# Altium PCB SL.PcbDoc (part 1 of 2)
Units mm, origin at the board's own origin, x right, y up, seen from the top; angles counter-clockwise.
Board outline 70 x 42.24 mm, 2 copper layers (Top Layer, Bottom Layer); 144 components, 106 nets, 459 pads, 155 vias.
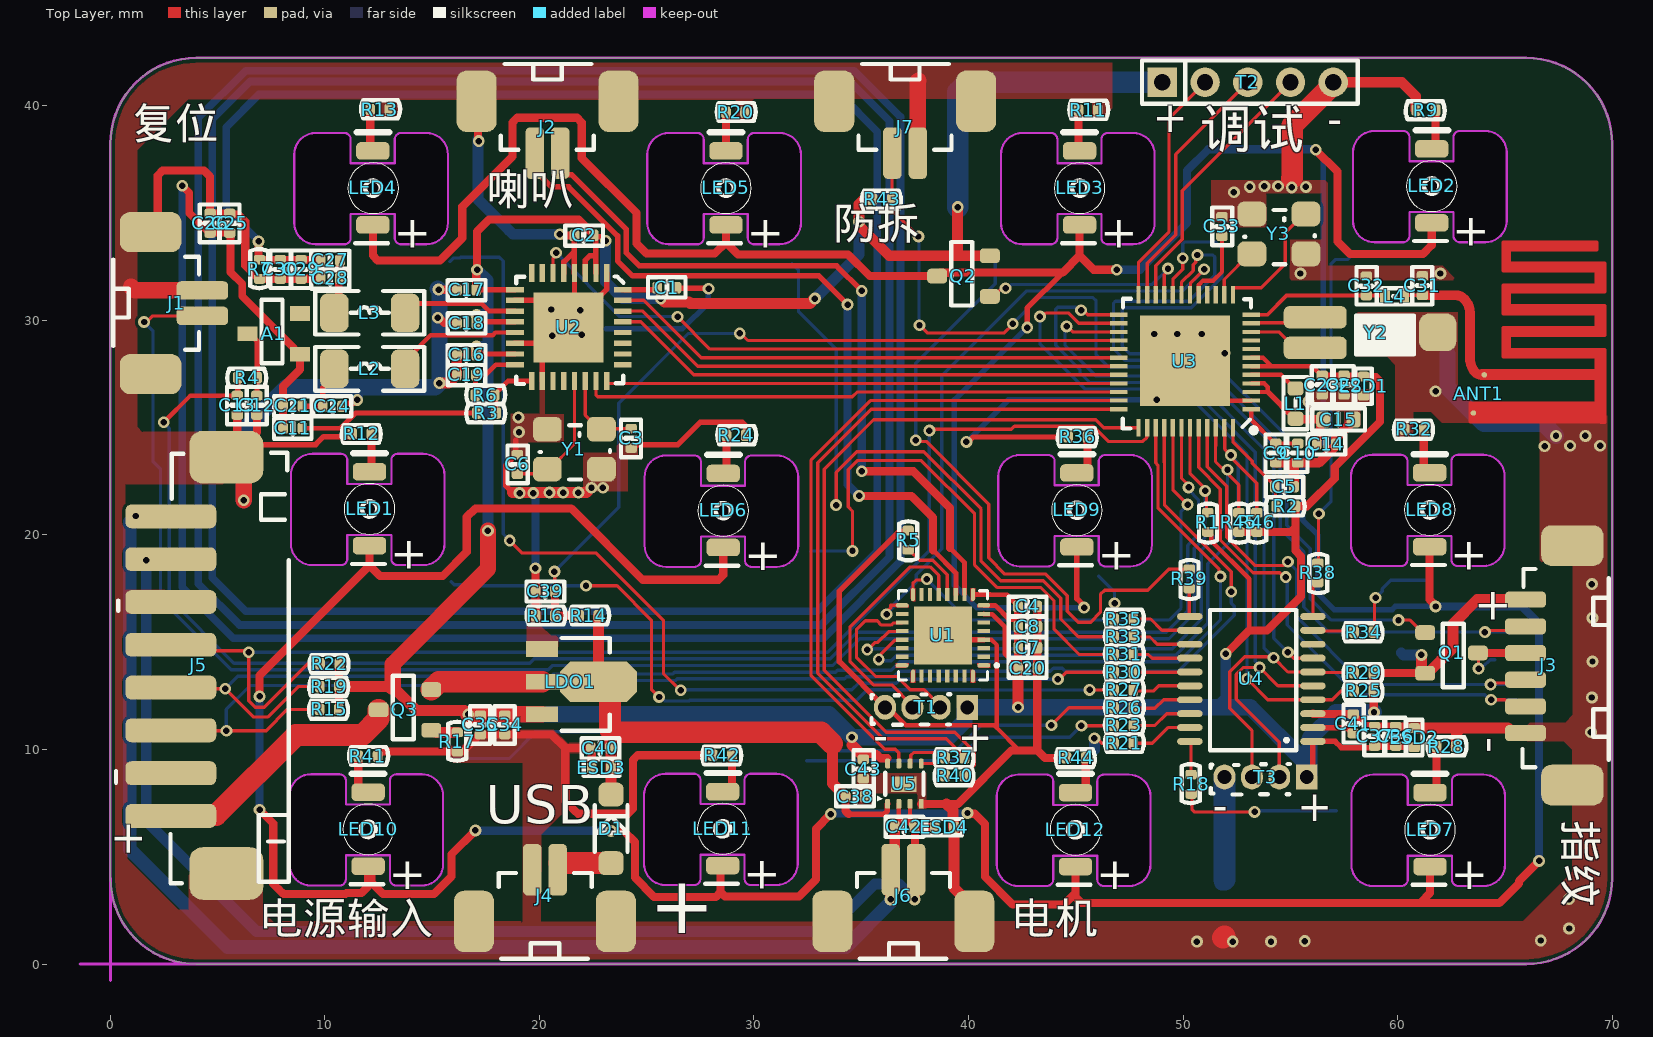
[diagram p0: Top Layer view]
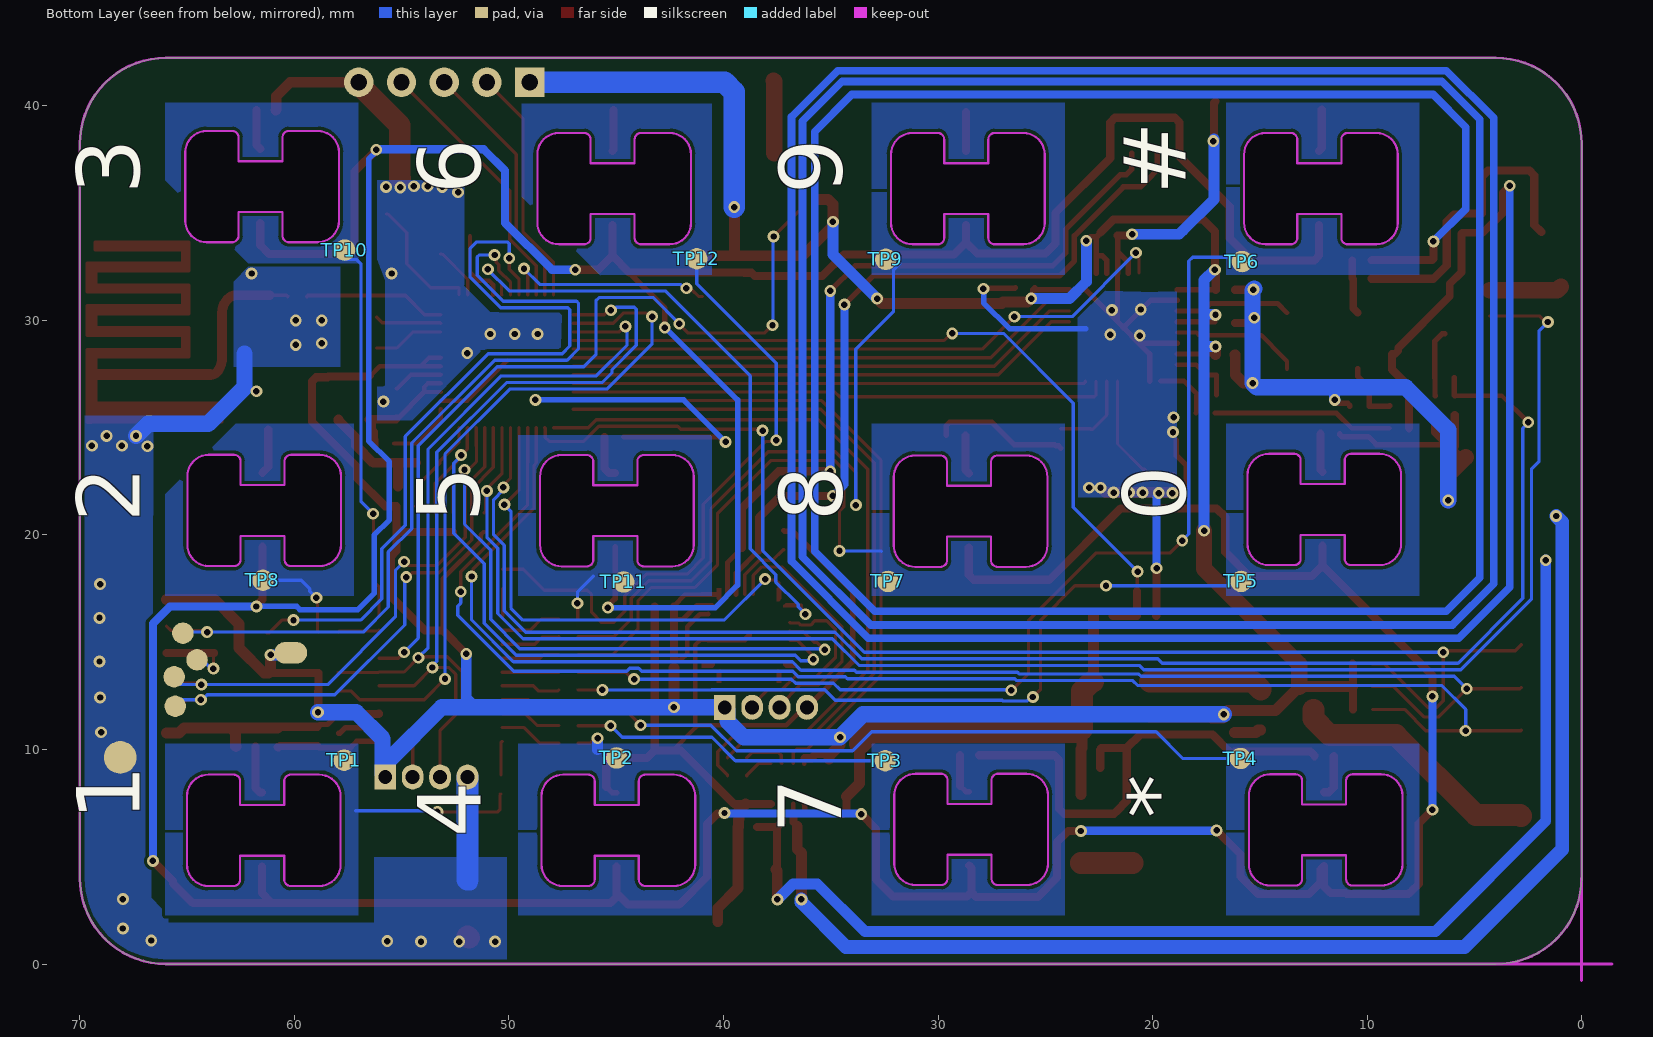
[diagram p1: Bottom Layer view, seen from below]

## Layer stack, top to bottom
Top Solder: solder mask 0.0102, Solder Resist, Dk 3.5
Top Layer: signal copper 0.0356
Dielectric 1: dielectric 0.32, FR-4, Dk 4.8
Bottom Layer: signal copper 0.0356
Bottom Solder: solder mask 0.0102, Solder Resist, Dk 3.5

## Board outline
0,4 0,38.237 cw(c4,38.237) 4,42.237 66,42.237 cw(c66,38.237) 70,38.237 70,4 cw(c66,4) 66,0 4,0 cw(c4,4)

## Design rules (kind name [scope] priority, off if disabled: settings)
Clearance [All] p1: gap=0.152 ignorepadtopadclearanceinfootprint=FALSE
PlaneConnect [All] p1: planeconnectstyle=Direct reliefexpansion=0.508 reliefentries=4 reliefconductorwidth=0.254 reliefairgap=0.254
PolygonConnect [All] p1: connectstyle=Direct reliefconductorwidth=0.254 reliefentries=4 polygonreliefangle="90 Angle" airgapwidth=0.254
RoutingVias [All] p1: holewidth=0.3 width=0.5 viastyle="Through Hole" minholewidth=0.3 minwidth=0.5 maxholewidth=0.35 maxwidth=0.55
SolderMaskExpansion [All] p1: expansion=0.102 istentingtop=FALSE
Width [All] p1: maxlimit=1.524 minlimit=0.152 preferedwidth=0.152
29 further rules are at their usual default settings.

## Components (designator, comment, footprint, x,y, rotation, side; value= is the part's Value field where it differs from the comment)
A1 "NC" A4 8.836,28.426 r180 top
ANT1 "射频天线/板载" "2.4G ANTENNA/ONBOARD" 63.914,26.572 r0 top
C1 "4.7uF/0402" CAP/0402 25.489,31.525 r270 top
C2 "0.1uF/0402" CAP/0402 22.527,33.964 r90 top
C3 "15pF/0402" CAP/0402 24.28,24.048 r0 top
C4 "10uF/0402" CAP/0402 43.203,16.666 r90 top
C5 "0.1uF/0402" CAP/0402 55.17,22.254 r90 top
C6 "15pF/0402" CAP/0402 18.971,23.737 r180 top
C7 "10uF/0402" CAP/0402 42.314,14.736 r270 top
C8 "0.1uF/0402" CAP/0402 42.314,15.726 r270 top
C9 "4.7uF/0402" CAP/0402 54.328,23.362 r0 top
C10 "0.1uF/0402" CAP/0402 55.344,23.362 r0 top
C11 "22pF/0402" CAP/0402 8.948,24.972 r90 top
C12 "NC" CAP/0402 6.83,25.597 r0 top
C13 "NC" CAP/0402 5.915,25.597 r0 top
C14 "0.1uF/0402" CAP/0402 57.131,24.235 r90 top
C15 "10uF/10%/0603" CAP/0603 57.949,25.378 r270 top
C16 "4.7uF/0402" CAP/0402 17.05,28.401 r90 top
C17 "4.7uF/0402" CAP/0402 17.05,31.424 r90 top
C18 "0.1uF/0402" CAP/0402 17.05,29.874 r90 top
C19 "0.1uF/0402" CAP/0402 17.041,27.461 r90 top
C20 "10uF/0402" CAP/0402 42.314,13.796 r270 top
C21 "22pF/0402" CAP/0402 8.948,26.013 r90 top
C22 "4.7uF/0402" CAP/0402 57.503,26.537 r0 top
C23 "0.1uF/0402" CAP/0402 56.487,26.537 r0 top
C24 "22pF/0402" CAP/0402 9.903,25.988 r270 top
C25 "47pF/0402" CAP/0402 5.56,34.081 r0 top
C26 "150pF/0402" CAP/0402 4.645,34.081 r0 top
C27 "NC" CAP/0402 10.7,32.805 r90 top
C28 "NC" CAP/0402 10.7,31.957 r90 top
C29 "NC" CAP/0402 8.887,32.83 r180 top
C30 "NC" CAP/0402 7.922,32.83 r180 top
C31 "NC" CAP/0402 61.16,31.17 r0 top
C32 "0.39pF/0402" CAP/0402 58.544,32.059 r180 top
C33 "2.2uF/0402" CAP/0402 51.813,34.827 r180 top
C34 "4.7uF/0402" CAP/0402 18.387,10.699 r0 top
C35 "4.7uF/0402" CAP/0402 17.249,10.699 r0 top
C36 "4.7uF/0402" CAP/0402 59.916,10.164 r0 top
C37 "0.1uF/0402" CAP/0402 58.925,10.164 r0 top
C38 "0.1uF/0402" CAP/0402 34.262,7.802 r270 top
C39 "0.1uF/0402" CAP/0402 20.718,17.377 r90 top
C40 "0.1uF/0402" CAP/0402 23.289,10.062 r90 top
C41 "10nF/0402" CAP/0402 57.935,11.647 r180 top
C42 "0.1uF/0402" CAP/0402 37.462,6.405 r90 top
C43 "0.1uF/0402" CAP/0402 35.1,9.539 r180 top
D1 "1N5819W/SOD-123" 1N5819W/SOD-123 23.34,7.903 r0 top
ESD1 "PB/SOD-882" ESD/SOD-882 58.417,26.486 r0 top
ESD2 "PB/SOD-882" ESD/SOD-882 60.779,11.002 r180 top
ESD3 "AF/SOD-882" ESD/SOD-882 23.34,9.148 r90 top
ESD4 "AF/SOD-882" ESD/SOD-882 38.427,6.379 r270 top
J1 "复位按键小板/1.25mm-2P 立贴" CONNECTOR/1.25-2P 4.29,30.211 r270 top
J2 "扬声器/1.25mm-2P 立贴" CONNECTOR/1.25-2P 19.784,37.799 r180 top
J3 "MX-6A/SMD-6+2/1.27" CONNECTOR/1.25-6P 67.053,13.923 r90 top
J4 "USB/1.25mm-2P 立贴" CONNECTOR/1.25-2P 20.851,4.398 r0 top
J5 "PH-8A/SMD-8+2/2.0" CONNECTOR/2.0-8P 4.112,13.923 r90 top
J6 "电机/1.25mm-2P 立贴" CONNECTOR/1.25-2P 37.557,4.398 r0 top
J7 "防拆/1.25mm-2P 立贴" CONNECTOR/1.25-2P 36.453,37.799 r180 top
L1 "22UH/0603" IND/0603 55.244,26.826 r0 top
L2 "1.5UH/1206" IND/1206 10.437,27.741 r0 top
L3 "NC" IND/1206 10.437,30.357 r0 top
L4 "22nH/0402" IND/0402 59.408,31.119 r270 top
LDO1 "HT7333/SOT-89" HT7333/SOT-89 20.122,11.642 r0 top
LED1 "白灯/1206" LED/1206 12.08,19.498 r0 top locked
LED2 "白灯/1206" LED/1206 61.59,34.547 r0 top locked
LED3 "白灯/1206" LED/1206 45.178,34.452 r0 top locked
LED4 "白灯/1206" LED/1206 12.236,34.452 r0 top locked
LED5 "白灯/1206" LED/1206 28.692,34.452 r0 top locked
LED6 "白灯/1206" LED/1206 28.566,19.418 r0 top locked
LED7 "白灯/1206" LED/1206 61.513,4.542 r0 top locked
LED8 "白灯/1206" LED/1206 61.494,19.453 r0 top locked
LED9 "白灯/1206" LED/1206 45.051,19.44 r0 top locked
LED10 "白灯/1206" LED/1206 12.014,4.561 r0 top locked
LED11 "白灯/1206" LED/1206 28.542,4.585 r0 top locked
LED12 "白灯/1206" LED/1206 44.985,4.541 r0 top locked
Q1 "3407/SOT-23" AO3407A/SOT-23 62.557,14.431 r270 top
Q2 "3407/SOT-23" AO3407A/SOT-23 39.723,32.135 r90 top
Q3 "3407/SOT-23" AO3407A/SOT-23 13.688,11.916 r90 top
R1 "10K/0402" RES/0402 51.153,21.035 r270 top
R2 "10K/0402" RES/0402 55.242,21.34 r180 top
R3 "2.4K/0402" RES/0402 17.98,25.683 r180 top
R4 "NC" RES/0402 6.839,27.334 r180 top
R5 "NC" RES/0402 37.183,20.207 r270 top
R6 "820R/0402" RES/0402 17.015,26.521 r0 top
R7 "0R/0402" RES/0402 6.957,31.932 r90 top
R9 "97.6R/0402" RES/0402 61.77,39.806 r180 top
R11 "97.6R/0402" RES/0402 45.123,39.806 r0 top
R12 "97.6R/0402" RES/0402 12.173,24.718 r180 top
R13 "97.6R/0402" RES/0402 12.113,39.831 r0 top
R14 "1M/0402" RES/0402 21.855,16.234 r0 top
R15 "1M/0402" RES/0402 10.649,11.866 r180 top
R16 "1M/0402" RES/0402 19.825,16.234 r0 top
R17 "390K/0402" RES/0402 16.177,9.9 r90 top
R18 "1K/0402" RES/0402 50.373,7.928 r90 top
R19 "1M/0402" RES/0402 10.659,12.931 r180 top
R20 "97.6R/0402" RES/0402 28.689,39.704 r0 top
R21 "1K/0402" RES/0402 46.784,10.291 r0 top
R22 "1M/0402" RES/0402 10.675,13.997 r180 top
R23 "1K/0402" RES/0402 46.784,11.118 r0 top
R24 "97.6R/0402" RES/0402 28.715,24.642 r0 top
R25 "5.1K/0402" RES/0402 58.87,12.729 r180 top
R26 "1K/0402" RES/0402 46.784,11.945 r0 top
R27 "1K/0402" RES/0402 46.784,12.773 r0 top
R28 "97.6R/0402" RES/0402 61.821,10.138 r0 top
R29 "5.1K/0402" RES/0402 58.87,13.567 r180 top
R30 "1K/0402" RES/0402 46.784,13.6 r0 top
R31 "1K/0402" RES/0402 46.784,14.427 r0 top
R32 "97.6R/0402" RES/0402 61.221,24.921 r180 top
R33 "1K/0402" RES/0402 46.784,15.255 r0 top
R34 "1K/0402" RES/0402 58.87,15.472 r180 top
R35 "1K/0402" RES/0402 46.784,16.082 r0 top
R36 "97.6R/0402" RES/0402 45.549,24.566 r180 top
R37 "1K/0402" RES/0402 39.809,9.605 r180 top
R38 "1K/0402" RES/0402 56.284,18.683 r270 top
R39 "1K/0402" RES/0402 50.289,18.403 r270 top
R40 "1K/0402" RES/0402 39.809,8.767 r180 top
R41 "97.6R/0402" RES/0402 11.554,9.681 r0 top
R42 "97.6R/0402" RES/0402 28.979,9.732 r180 top
R43 "1K/0402" RES/0402 36.421,35.64 r180 top
R44 "97.6R/0402" RES/0402 45.463,9.605 r180 top
R45 "4.7K/0402" RES/0402 52.601,21.035 r270 top
R46 "4.7K/0402" RES/0402 53.439,21.035 r270 top
T1 "1.25间距/4P/通孔焊盘" TESTPOINT/1.25-4P 39.941,11.967 r0 top
T2 "2.0间距/5P/通孔焊盘" TESTPOINT/2.0-5P 49.034,41.101 r0 top
T3 "1.25间距/4P/通孔焊盘" TESTPOINT/1.25-4P 55.765,8.716 r0 top
TP1 "触摸电容点" TOUCH-PAD 57.681,9.503 r90 bottom
TP2 "触摸电容点" TOUCH-PAD 44.981,9.605 r90 bottom
TP3 "触摸电容点" TOUCH-PAD 32.458,9.478 r90 bottom
TP4 "触摸电容点" TOUCH-PAD 15.898,9.58 r90 bottom
TP5 "触摸电容点" TOUCH-PAD 15.872,17.835 r90 bottom
TP6 "触摸电容点" TOUCH-PAD 15.821,32.744 r90 bottom
TP7 "触摸电容点" TOUCH-PAD 32.331,17.835 r90 bottom
TP8 "触摸电容点" TOUCH-PAD 61.465,17.885 r90 bottom
TP9 "触摸电容点" TOUCH-PAD 32.433,32.846 r90 bottom
TP10 "触摸电容点" TOUCH-PAD 57.655,33.278 r90 bottom
TP11 "触摸电容点" TOUCH-PAD 44.65,17.809 r90 bottom
TP12 "触摸电容点" TOUCH-PAD 41.247,32.871 r90 bottom
U1 "WTV380-P/QFN-32" WTV380-P/QFN-32 38.808,15.32 r180 top
U2 "FM17580/QFN-32" FM17580/QFN-32 23.134,32.206 r0 top
U3 "HS6621CG/QFN-48" HS6621CG/QFN-48 53.18,25.863 r0 top
U4 "SC92F8372X 3SGW140551-H 2129/SSOP-20" SC92F8372/SSOP20 53.185,13.288 r180 top
U5 "AW8637C/DFN-8" AW8637C/DFN-6 37.014,8.404 r90 top
Y1 "27.120MHZ(无源)/3225-4" "SMD CRYSTL/3225-4P" 20.368,24.926 r0 top
Y2 "NC" "SMD CRYSTAL/2P" 56.161,30.147 r0 top
Y3 "32.000MHZ(无源)/3225-4" "SMD CRYSTL/3225-4P" 53.21,34.959 r0 top

## Footprints (in the part's own frame and the unit in brackets; to place one, negate y for a bottom-side part, rotate by r counter-clockwise, add the part's x,y. Pads: shape width x height; smd on the part's side, far side on the other; paste and mask are expansions set on the pad)
1N5819W/SOD-123 [mm]
  rrect50% 1.16x1.11 smd: 1(0,-3.201) 2(0,0)
  silkscreen extent -0.76,-2.67 0.76,-0.51
"2.4G ANTENNA/ONBOARD" [mil]
  round 10 smd mask+0: 1(5,35) 2(-15,-35)
  Top Layer region: -20,-20 -20,-50 215,-50 215,-20
  Top Layer region: 215,40 215,30 0,30 0,40
  Top Layer lines w6.91: 210.44,147.34 210.44,121.09 40.02,121.09 40.02,68.38 210.44,68.38 210.44,42.54 ; 210.44,147.54 40.02,147.54 40.02,199 210.44,199 210.44,226.09 40.02,226.09 40.02,278.59 210.44,278.59 ; 210.85,278.59 210.85,264.42 50.85,264.42 50.85,239.84 226.27,239.84 226.27,187.75 50.85,187.75 50.85,161.5 226.27,161.5 226.27,107.75 50.85,107.75 50.85,81.09 226.27,81.09 226.27,-51.83 218.77,-51.83 ; 220.2,-50.58 -20.4,-50.58 ; -20.4,-50.58 -20.4,-35 ; -20.4,-50.58 -20.4,-35 ; -20.4,-35 -20.4,-17.66 ; -20.4,-35 -20.4,-17.66 ; -20.4,-17.66 210.44,-17.66 210.44,29 ; -0.6,35 -0.6,36 ; -0.6,35 -0.6,36 ; -0.6,35 -0.6,29.21 -0.6,35 ; -0.6,36 -0.6,42.54 ; -0.6,36 -0.6,42.54 ; -0.6,42.54 5,42.54 ; -0.6,42.54 5,42.54 ; 5,29 -0.4,29 5,29 ; 5,29 210.44,29 ; 5,29 210.44,29 ; 5,42.54 210.44,42.54 ; 5,42.54 210.44,42.54
  Top Layer lines w8.91: 44.4,229 44.4,273.59 208.35,273.59 ; 46.9,230.46 215.33,230.46 ; 47.52,268.17 208.56,268.17 ; 49.4,234.21 222.52,234.21 ; 212.83,194.32 45.54,194.32 45.54,154.52 217.83,154.52 219.19,154.52 ; 215.33,190.88 215.33,230.46 ; 215.33,233.07 215.33,230.46 ; 222,191.82 222,228.17 ; 222.94,230.46 215.33,230.46
  Top Layer lines w10.91: 210.23,156.09 217.83,156.09 217.83,154.52 217.83,115.15 221.58,115.15 221.58,112.34 215.96,112.34 215.96,114.21 44.6,114.21 44.6,74.11 217.52,74.11 217.52,35.77 ; 217.52,35.67 218.35,35.67 218.35,-48.29 ; 221.27,76.29 222.31,76.29
A4 [mm]
  rect 0.929x0.688 smd: 1(0,0) 2(0,-1.894) 3(2.454,-0.947)
  silkscreen extent 0.81,-2.54 1.8,0.42
AO3407A/SOT-23 [mil]
  rrect50% 27.1x36.59 smd: 1(-40,-50) 2(34.58,-50) 3(-2.71,46.6)
  silkscreen extent -57,-18 60,21
AW8637C/DFN-6 [mm]
  rect 0.723x1.193 smd: 0(-0.018,0.034)
  rrect50% 0.454x0.227 smd: 1(-0.938,0.783) 2(-0.938,0.261) 3(-0.938,-0.261) 4(-0.938,-0.783) 5(0.938,-0.783) 6(0.938,-0.261) 7(0.938,0.261) 8(0.938,0.783)
  silkscreen extent -0.83,-0.89 0.51,1.27
CAP/0402 [mm]
  rrect50% 0.535x0.456 smd: 1(0,0) 2(0,0.899)
  silkscreen extent -0.48,-0.43 0.46,1.32
CAP/0603 [mm]
  rrect50% 0.742x0.658 smd: 1(0,0) 2(0,-1.411)
  silkscreen extent -0.53,-1.93 0.51,0.54
CONNECTOR/1.25-2P [mm]
  rrect50% 0.858x2.404 smd: 1(0,0) 2(-1.187,0)
  rrect50% 1.867x2.865 smd: 3(-3.903,-2.413) 4(2.711,-2.413)
  silkscreen extent -2.75,-4.15 1.58,-0.16
CONNECTOR/1.25-6P [mm]
  rrect50% 0.751x1.904 smd: 1(3.062,1.09) 2(1.817,1.09) 3(0.573,1.09) 4(-0.672,1.09) 5(-1.916,1.09) 6(-3.161,1.09)
  rrect50% 1.894x2.895 smd: 7(-5.58,-1.09) 8(5.58,-1.09)
  silkscreen extent -4.76,-2.8 4.49,1.23
CONNECTOR/2.0-8P [mm]
  rrect50% 1.11x4.233 smd: 1(-7.021,1.293) 2(-5.026,1.293) 3(-3.032,1.293) 4(-1.037,1.293) 5(0.958,1.293) 6(2.953,1.293) 7(4.948,1.293) 8(6.943,1.293)
  rrect50% 2.456x3.446 smd: 9(9.703,-1.293) 10(-9.703,-1.293)
  silkscreen extent -10.16,-4.2 9.91,3.85
ESD/SOD-882 [mm]
  rrect50% 0.535x0.456 smd: 1(0,0) 2(0,0.899)
  silkscreen extent -0.38,-0.38 0.38,1.27
FM17580/QFN-32 [mm]
  rect 0.25x0.833 smd: 1(0,0) 2(-0.5,0) 3(-1,0) 4(-1.5,0) 5(-2,0) 6(-2.5,0) 7(-3,0) 8(-3.5,0) 17(-3.5,-5.034) 18(-3,-5.034) 19(-2.5,-5.034) 20(-2,-5.034) 21(-1.5,-5.034) 22(-1,-5.034) 23(-0.5,-5.034) 24(0,-5.034)
  rect 0.833x0.25 smd: 9(-4.28,-0.771) 10(-4.28,-1.271) 11(-4.28,-1.771) 12(-4.28,-2.271) 13(-4.28,-2.771) 14(-4.28,-3.271) 15(-4.28,-3.771) 16(-4.28,-4.271) 25(0.75,-4.271) 26(0.75,-3.771) 27(0.75,-3.271) 28(0.75,-2.771) 29(0.75,-2.271) 30(0.75,-1.771) 31(0.75,-1.271) 32(0.75,-0.771)
  rect 3.259x3.259 smd: 33(-1.778,-2.54)
  silkscreen extent -4.22,-5.17 0.78,-0.16
HS6621CG/QFN-48 [mm]
  rect 0.809x0.2 smd: 1(0,0) 2(0,0.4) 3(0,0.8) 4(0,1.2) 5(0,1.6) 6(0,2) 7(0,2.4) 8(0,2.8) 9(0,3.2) 10(0,3.6) 11(0,4) 12(0,4.4) 25(-6.18,4.4) 26(-6.18,4) 27(-6.18,3.6) 28(-6.18,3.2) 29(-6.18,2.8) 30(-6.18,2.4) 31(-6.18,2) 32(-6.18,1.6) 33(-6.18,1.2) 34(-6.18,0.8) 35(-6.18,0.4) 36(-6.18,0)
  rect 0.2x0.809 smd: 13(-0.853,5.326) 14(-1.253,5.326) 15(-1.653,5.326) 16(-2.053,5.326) 17(-2.453,5.326) 18(-2.853,5.326) 19(-3.253,5.326) 20(-3.653,5.326) 21(-4.053,5.326) 22(-4.453,5.326) 23(-4.853,5.326) 24(-5.253,5.326) 37(-5.253,-0.871) 38(-4.853,-0.871) 39(-4.453,-0.871) 40(-4.053,-0.871) 41(-3.653,-0.871) 42(-3.253,-0.871) 43(-2.853,-0.871) 44(-2.453,-0.871) 45(-2.053,-0.871) 46(-1.653,-0.871) 47(-1.253,-0.871) 48(-0.853,-0.871)
  rect 4.2x4.2 smd: 49(-3.094,2.258)
  silkscreen extent -6,-1.12 0.25,5.14
HT7333/SOT-89 [mm]
  rect 1.489x0.731 smd: 1(0,3.037) 2(0,1.519) 2(1.058,1.519) 3(0,0)
  oct 3.597x1.9 smd: 2(2.637,1.519)
  silkscreen extent 0.91,-0.77 3.16,3.56
IND/0402 [mm]
  rect 0.535x0.456 smd: 1(0,0) 2(0,0.899)
  silkscreen extent -0.38,-0.38 0.38,1.27
IND/0603 [mm]
  rrect50% 0.742x0.658 smd: 1(0,0) 2(0,-1.411)
  silkscreen extent -0.56,-1.91 0.56,0.53
IND/1206 [mm]
  rrect50% 1.325x1.79 smd: 1(0,0) 2(3.3,0)
  silkscreen extent -0.89,-1.02 4.19,1.02
LED/1206 [mm]
  rrect50% 1.555x0.815 smd: 1(0,0) 2(0,3.448)
  Keep-Out Layer board cut-out: -2.666,-0.904 -3.049,-0.828 -3.373,-0.611 -3.59,-0.287 -3.666,0.096 -3.666,0.096 -3.666,3.284 -3.59,3.667 -3.373,3.991 -3.049,4.208 -2.666,4.284 -2.666,4.284 -1.336,4.284 -1.221,4.261 -1.124,4.196 -1.059,4.099 -1.036,3.984 -1.036,3.984 -1.036,2.874 1.017,2.874 1.017,3.984 1.04,4.099 1.105,4.196 1.202,4.261 1.317,4.284 1.317,4.284 2.497,4.284 2.88,4.208 3.204,3.991 3.421,3.667 3.497,3.284 3.497,3.284 3.497,0.096 3.421,-0.287 3.204,-0.611 2.88,-0.828 2.497,-0.904 2.497,-0.904 1.317,-0.904 1.202,-0.881 1.105,-0.816 1.04,-0.719 1.017,-0.604 1.017,-0.604 1.017,0.506 -1.036,0.506 -1.036,-0.604 -1.059,-0.719 -1.124,-0.816 -1.221,-0.881 -1.336,-0.904 -1.336,-0.904
  Keep-Out Layer lines w0.1: -3.666,0.096 ccw(c-2.666,0.096) -2.666,-0.904 -1.336,-0.904 ccw(c-1.336,-0.604) -1.036,-0.604 -1.036,0.506 1.017,0.506 1.017,-0.604 ccw(c1.317,-0.604) 1.317,-0.904 2.497,-0.904 ccw(c2.497,0.096) 3.497,0.096 3.497,3.284 ccw(c2.497,3.284) 2.497,4.284 1.317,4.284 ccw(c1.317,3.984) 1.017,3.984 1.017,2.874 -1.036,2.874 -1.036,3.984 ccw(c-1.336,3.984) -1.336,4.284 -2.666,4.284 ccw(c-2.666,3.284) -3.666,3.284 -3.666,0.096
  silkscreen extent -0.82,-0.85 0.76,4.32
RES/0402 [mm]
  rrect50% 0.456x0.535 smd: 1(0,0) 2(0.899,0)
  silkscreen extent -0.43,-0.41 1.39,0.43
SC92F8372/SSOP20 [mm]
  oval 1.186x0.317 smd: 1(-2.869,2.912) 2(-2.869,2.265) 3(-2.869,1.618) 4(-2.869,0.971) 5(-2.869,0.324) 6(-2.869,-0.324) 7(-2.869,-0.971) 8(-2.869,-1.618) 9(-2.869,-2.265) 10(-2.869,-2.912) 11(2.869,-2.912) 12(2.869,-2.265) 13(2.869,-1.618) 14(2.869,-0.971) 15(2.869,-0.324) 16(2.869,0.324) 17(2.869,0.971) 18(2.869,1.618) 19(2.869,2.265) 20(2.869,2.912)
  silkscreen extent -2.09,-3.22 1.92,3.33
"SMD CRYSTAL/2P" [mm]
  rrect50% 2.934x1.041 smd: 1(0,0) 2(0,-1.428)
  rrect50% 1.732x1.744 smd: 3(5.711,-0.705)
  silkscreen extent 1.9,-1.74 4.59,0.08
"SMD CRYSTL/3225-4P" [mm]
  rrect50% 1.342x1.153 smd: 1(0,0) 2(0,-1.859) 3(2.521,-1.859) 4(2.521,0)
  silkscreen extent -0.35,-2.34 2.92,0.19
TESTPOINT/1.25-4P [mm]
  rect 1.015x1.168 hole 0.65: 1(0,0)
  oval 1.015x1.168 hole 0.65: 2(-1.277,0) 3(-2.555,0) 4(-3.832,0)
  silkscreen extent -4.47,-0.82 -0.79,0.6
TESTPOINT/2.0-5P [mil]
  rect 53.98x53.98 hole 30: 1(0,0)
  round 53.98 hole 30: 2(78.43,0) 3(156.85,0) 4(235.27,0) 5(313.7,0)
  silkscreen extent -37,-39 358,40
TOUCH-PAD [mm]
  round 1 smd mask+0.102: 1(0,0)
WTV380-P/QFN-32 [mm]
  oval 0.601x0.2 smd: 1(-1.9,1.4) 8(-1.9,-1.4) 17(1.9,-1.4) 24(1.9,1.4)
  rect 0.6x0.2 smd paste-100 mask+0.05: 2(-1.9,1) 3(-1.9,0.6) 4(-1.9,0.2) 5(-1.9,-0.2) 6(-1.9,-0.6) 7(-1.9,-1) 18(1.9,-1) 19(1.9,-0.6) 20(1.9,-0.2) 21(1.9,0.2) 22(1.9,0.6) 23(1.9,1)
  oval 0.2x0.601 smd: 9(-1.4,-1.9) 16(1.4,-1.9) 25(1.4,1.9) 32(-1.4,1.9)
  rect 0.2x0.6 smd paste-100 mask+0.05: 10(-1,-1.9) 11(-0.6,-1.9) 12(-0.2,-1.9) 13(0.2,-1.9) 14(0.6,-1.9) 15(1,-1.9) 26(1,1.9) 27(0.6,1.9) 28(0.2,1.9) 29(-0.2,1.9) 30(-0.6,1.9) 31(-1,1.9)
  rect 2.7x2.7 smd paste-100 mask+0.05: 33(0,0)
  Top Layer region: -1.5,2.201 -1.5,1.7 -1.401,1.601 -1.401,1.6 -1.3,1.6 -1.3,2.2 -1.375,2.2 -1.5,2.201
  Top Layer region: -2.201,1.5 -1.7,1.5 -1.601,1.401 -1.6,1.401 -1.6,1.3 -2.2,1.3 -2.2,1.375 -2.201,1.5
  Top Layer region: -2.201,-1.5 -1.7,-1.5 -1.601,-1.401 -1.6,-1.401 -1.6,-1.3 -2.2,-1.3 -2.2,-1.375 -2.201,-1.5
  Top Layer region: -1.5,-2.201 -1.5,-1.7 -1.401,-1.601 -1.401,-1.6 -1.3,-1.6 -1.3,-2.2 -1.375,-2.2 -1.5,-2.201
  Top Layer region: 1.5,-2.201 1.5,-1.7 1.4,-1.601 1.4,-1.6 1.3,-1.6 1.3,-2.2 1.374,-2.2 1.5,-2.201
  Top Layer region: 2.201,-1.5 1.7,-1.5 1.601,-1.4 1.6,-1.4 1.6,-1.3 2.2,-1.3 2.2,-1.374 2.201,-1.5
  Top Layer region: 1.5,2.201 1.5,1.7 1.401,1.601 1.401,1.6 1.3,1.6 1.3,2.2 1.375,2.2 1.5,2.201
  Top Layer region: 2.2,1.375 2.201,1.5 1.7,1.5 1.601,1.401 1.6,1.401 1.6,1.3 2.2,1.3 2.2,1.375
  silkscreen extent -2.58,-2.08 2.08,2.08

## Part data
A1: library part A4, "默认不焊接"
ANT1: library part RF-ANTENNA, "蓝牙芯片射频天线 板载封装"
C1 C2 C3 C4 C5 C6 C7 C8 C9 C10 C11 C12 C13 C14 C16 C17 C18 C19 C20 C21 C22 C23 C24 C25 C26 C27 C28 C29 C30 C31 C32 C33 C34 C35 C36 C37 C38 C39 C40 C41 C42 C43: library part CAP0402, "0402电容"
C15: library part CAP0603, "0603电容"
D1: library part DIODE, "防反接肖基特二极管"
ESD1 ESD2: library part ESD-2, "双向静电保护二极管"
ESD3 ESD4: library part ESD-1, "双向静电保护二极管"
J1 J2 J4 J6 J7: library part "1.25-2P LT", "1.25mm间距2引脚 立贴"
J3: library part "1.25-6P LT", "1.25mm间距6引脚 立贴"
J5: library part "PH2.0-8P LT", "2.0mm间距8引脚 立贴"
L1: library part L0603, "0603电感"
L2 L3: library part L1206, "1206电感"
L4: library part L0402, "0402电感"
LDO1: library part HT7333, "低压差线性稳压器(LDO)"
LED1 LED2 LED3 LED4 LED5 LED6 LED7 LED8 LED9 LED10 LED11 LED12: library part LED, "1206白灯"
Q1 Q2 Q3: library part AO3407A, "PMOS"
R1 R2 R3 R4 R5 R6 R7 R9 R11 R12 R13 R14 R15 R16 R17 R18 R19 R20 R21 R22 R23 R24 R25 R26 R27 R28 R29 R30 R31 R32 R33 R34 R35 R36 R37 R38 R39 R40 R41 R42 R43 R44 R45 R46: library part RES0402, "0402电阻"
T1 T3: library part TESTPOINTS-4P-1.25, "触摸芯片调试接口"
T2: library part TESTPOINTS-5P-2.0, "单片机烧录调试接口"
TP1 TP2 TP3 TP4 TP5 TP6 TP7 TP8 TP9 TP10 TP11 TP12: library part TOUCH-POINT, "触摸芯片电容触摸点"
U1: library part WTV380-P, "语音芯片"
U2: library part FM17580, "NFC读写芯片"
U3: library part HS6621CG, "蓝牙主控MCU"
U4: library part SC92F8372X, "电容触摸芯片"
U5: library part AW8637C, "H桥直流电机驱动芯片"
Y1: library part 27.120MHZ, "27.120MHZ无源晶振"
Y2: library part 32K, "32.768KHZ无源晶振 默认不焊"
Y3: library part 32MHZ, "32MHZ无源晶振"

## Free pads (board coordinates)
  oval 1.524x1.016 smd far side: 1(60.17,14.507)
  round 1 smd far side: 1(64.539,14.177) 1(65.199,15.422) 1(65.555,12.018) 1(65.605,13.39)
  round 1.524 smd far side: 2(68.12,9.63)

## Via types
v1: diameter 0.55, hole 0.3, Top Layer to Bottom Layer, tented both sides, 155 vias

## Nets (pads, with @x,y where several pads share a name; then routed paths per layer and width w, separated by ;. In a path a pad name is that pad's centre, name@x,y a point inside that pad or via, vN(x,y) a via of type N, cw(c..) or ccw(c..) an arc to the next point about the centre after c; other vN are vias at no path point)
BOOT: T2.4 U3.22 | length 12.5
  Top Layer w0.152: U3.22@48.726,31.189 48.726,32.554 49.959,33.787 49.959,36.05 T2.4@55.01,41.101
"BUSY GPIO7": U1.17 U3.18 | length 29
  Top Layer w0.152: v1(36.18,16.304) 36.18,16.412 36.379,16.611 36.379,16.72 U1.17@36.908,16.72 ; U3.18@50.326,31.189 50.35,31.213 50.35,31.756 v1(50.979,32.386)
  Bottom Layer w0.152: v1(36.18,16.304) 36.18,16.317 36.515,16.651 36.515,16.759 37.559,17.804 37.559,17.933 37.559,18.154 38.758,19.352 38.758,27.41 42.72,31.373 49.986,31.373 50.979,32.366 v1(50.979,32.386)
GND: ANT1.1 ANT1.2 C1.2 C2.2 C3.1 C4.1 C5.1 C6.1 C7.2 C8.2 C9.1 C10.1 C12.1 C13.1 C14.1 C15.1 C16.2 C17.2 C18.2 C19.2 C20.2 C22.1 C23.1 C24.2 C25.2 C26.2 C28.2 C29.2 C30.2 C31.1 C31.2 C32.1 C33.1 C34.1 C35.1 C36.2 C37.2 C38.2 C39.2 C40.2 C41.1 C43.2 ESD1.1 ESD2.1 ESD3.2 ESD4.2 J1.2 J1.3 J1.4 J2.3 J2.4 J3.6 J3.7 J3.8 J4.2 J4.3 J4.4 J5.2 J5.6 J5.9 J5.10 J6.3 J6.4 J7.2 J7.3 J7.4 L4.2 LDO1.1 pad.2 R5.1 R7.1 R9.2 R11.2 R12.2 R13.2 R16.1 R17.1 R20.2 R24.2 R28.2 R32.2 R36.2 R41.2 R42.2 R44.2 T1.4 T2.5 T3.4 U1.4 U1.33 U2.1 U2.4 U2.5 U2.10 U2.14 U2.18 U2.33 U3.2 U3.49 U4.3 U5.0 U5.4 Y1.1 Y1.3 Y2.3 Y3.1 Y3.3 | length 241.9
  Top Layer w0.178: L4.2@60.306,31.119 60.357,31.17 C31.1@61.16,31.17 ; ANT1.1@64.041,27.461 64.183,27.461
  Top Layer w0.203: T1.4@36.109,11.967 36.233,11.967 37.07,11.129 41.196,11.129 41.323,11.002 ; U1.4@40.708,15.12 40.71,15.119 41.069,15.119 41.323,14.865 41.323,11.002 ; 42.369,9.956 41.323,11.002 ; U3.49@50.086,28.122 51.944,26.263 U3.2@53.18,26.263
  Top Layer w0.254: J5.9@5.988,24.21 9.573,24.21 9.941,24.578 11.174,24.578 11.275,24.679 R12.2@11.275,24.718 ; C24.2@10.802,25.988 10.802,26.028 10.903,26.129 11.339,26.129 v1(11.503,26.293) ; 18.742,21.975 18.424,22.293 18.424,23.23 18.895,23.7 18.895,24.413 ; U2.14@18.854,28.935 U2.33@20.625,28.935 ; U2.10@18.854,30.935 20.087,30.935 U2.33@21.356,29.666 ; U2.18@20.134,27.172 20.134,28.444 U2.33@20.625,28.935 ; U2.5@21.134,32.206 21.136,32.208 21.136,32.728 21.628,33.221 ; C2.2@21.628,33.964 21.632,33.96 21.632,32.208 U2.4@21.634,32.206 U2.33@21.634,29.944 ; U2.1@23.134,32.206 23.134,31.444 U2.33@21.634,29.944 ; C3.1@24.28,24.048 24.381,24.149 24.508,24.149 24.569,24.21 26.454,24.21 27.492,25.248 29.465,25.248 29.614,25.099 R24.2@29.614,24.642 ; C1.2@26.388,31.525 26.413,31.5 27.861,31.5 v1(27.886,31.474) ; T1.4@36.109,11.967 33.982,14.094 33.982,17.377 36.767,20.162 37.138,20.162 R5.1@37.183,20.207 ; U1.33@38.808,15.32 39.008,15.12 U1.4@40.708,15.12 ; v1(39.901,24.337) 39.981,24.337 40.209,24.566 R36.2@44.65,24.566 ; C41.1@57.935,11.647 57.974,11.647 58.457,11.164 58.824,11.164 C37.2@58.925,11.063 ; U2.33@20.625,28.935 U2.33@21.356,29.666 ; U2.33@21.356,29.666 U2.33@21.634,29.944
  Top Layer w0.381: J1.3@1.876,34.114 2.207,34.445 2.207,36.758 2.436,36.986 4.366,36.986 4.645,36.707 C26.2@4.645,34.98 C25.2@5.56,34.98 5.597,34.942 5.953,34.942 6.288,34.607 6.288,32.561 6.917,31.932 R7.1@6.957,31.932 6.969,31.944 9.789,31.944 C28.2@9.802,31.957 ; J5.9@5.67,23.626 6.83,24.786 C12.1@6.83,25.597 ; J5.9@5.915,24.137 C13.1@5.915,25.597 ; R41.2@12.453,9.681 12.453,9.721 12.632,9.9 R17.1@16.177,9.9 ; v1(15.263,30.128) 15.308,30.128 15.562,29.874 C18.2@16.152,29.874 ; v1(15.301,31.436) 15.307,31.43 16.145,31.43 C17.2@16.152,31.424 ; 16.448,9.938 17.209,10.699 C35.1@17.249,10.699 C34.1@18.387,10.699 20.57,10.699 21.206,10.062 ; J2.4@17.072,40.212 17.137,40.147 17.137,38.39 v1(17.17,38.358) ; v1(19.809,18.444) 19.819,18.434 C39.2@19.819,17.377 19.822,17.375 19.822,16.237 R16.1@19.825,16.234 ; v1(20.952,34.014) 21.003,33.964 C2.2@21.628,33.964 ; ESD3.2@22.441,9.148 22.441,9.972 22.39,10.023 C40.2@22.39,10.062 21.206,10.062 ; R42.2@28.08,9.732 24.579,9.732 24.356,9.509 24.356,7.237 24.124,7.005 21.799,7.005 21.663,7.141 21.206,7.598 21.206,10.062 ; U5.4@37.797,7.466 38.972,7.466 39.504,7.466 41.994,9.956 42.369,9.956 43.207,9.956 ; C4.1@43.203,16.666 43.207,16.661 43.207,9.956 ; R44.2@44.564,9.605 43.558,9.605 43.406,9.757 43.207,9.956 ; U4.3@56.054,11.67 56.065,11.658 57.923,11.658 C41.1@57.935,11.647 ; C37.2@58.925,11.063 C36.2@59.916,11.063 60.679,11.063 60.74,11.002 ESD2.1@60.779,11.002
  Top Layer w0.457: C9.1@54.328,23.362 C10.1@55.305,23.362 ; C5.1@55.17,22.254 55.17,23.227 C10.1@55.305,23.362 ; C14.1@57.131,24.235 57.131,24.166 56.327,23.362 C10.1@55.344,23.362 C10.1@55.305,23.362 ; C14.1@57.131,24.235 57.132,24.519 57.949,25.336 C15.1@57.949,25.378 ; C31.1@61.16,31.17 62.74,31.17 cw(c62.74,30.712) 63.013,31.079 cw(c62.482,30.367) 63.37,30.367 63.37,28.273 ccw(c64.519,28.273) 63.535,27.68 ccw(c63.926,27.918) 63.898,27.461
  Top Layer w0.508: v1(15.339,27.08) 15.347,27.088 15.757,27.088 16.13,27.461 C19.2@16.142,27.461 16.147,27.466 16.147,28.396 C16.2@16.152,28.401 ; 18.742,21.975 v1(20.464,21.975) v1(21.105,21.975) v1(21.816,21.975) 22.185,21.975 22.414,22.203 v1(22.425,22.203) ; 38.972,7.466 39.27,7.168 39.27,6.757 39.3,6.727 39.3,6.393 39.314,6.379 ESD4.2@39.326,6.379 39.326,3.542 40.269,2.599 J6.4@40.269,1.985 ; T2.5@57.002,41.101 60.195,41.101 60.845,40.451 60.845,39.819 60.859,39.806 R9.2@60.871,39.806 ; ESD2.1@60.779,11.002 62.963,11.002 ; R28.2@62.719,10.138 62.732,10.138 62.745,10.152 62.745,10.784 62.963,11.002 ; J3.6@65.963,10.762 65.387,10.762 65.147,11.002 62.963,11.002
  Top Layer w0.762: 0.962,31.576 1.14,31.398 J1.2@4.29,31.398 ; J5.9@5.405,23.626 6.22,22.811 v1(6.22,21.619) ; J7.2@37.64,37.799 37.64,41.152 37.665,41.177
  Top Layer w1.016: 51.864,1.223 51.933,1.292 ; 55.064,36.631 55.09,36.656 55.09,39.093 57.002,41.005 T2.5@57.002,41.101
  Bottom Layer w0.254: 23.111,29.62 24.887,29.62 24.892,29.615 26.668,29.615 27.871,30.818 27.871,31.459 v1(27.886,31.474) ; v1(39.901,24.337) 41.856,26.293 v1(48.765,26.293)
  Bottom Layer w0.381: v1(19.708,21.949) 19.708,21.904 19.809,21.802 v1(19.809,18.444)
  Bottom Layer w0.508: v1(11.503,26.293) 11.511,26.301 11.511,26.72 11.668,26.877 ; v1@17.142,38.459 17.142,35.64 18.59,34.192 18.768,34.014 v1(20.952,34.014)
  Bottom Layer w0.762: v1(6.22,21.619) 6.22,24.896 8.201,26.877 11.503,26.877 ; 11.668,26.877 15.136,26.877 v1(15.339,27.08) 15.339,31.398 v1(15.301,31.436) v1@15.263,31.474 ; 51.813,3.814 51.933,3.933 ; 62.329,28.452 62.329,26.877 64.031,25.175 66.825,25.175 v1(67.383,24.616)
  Bottom Layer w1.016: 51.933,3.933 T3.4@51.933,8.716
  other v1: 50.645,1.045 52.321,1.045 54.099,1.045 55.674,1.071 66.672,1.096 67.993,1.655 67.993,3.026 69.009,10.799 69.06,12.424 69.085,14.101 69.085,16.133 69.06,17.708 19.073,21.949 22.959,22.203 66.85,24.134 68.044,24.159 69.441,24.159 68.755,24.616 19.047,24.794 19.022,25.48 55.852,26.217 61.77,26.699 51.94,28.477 59.941,28.858 58.722,28.934 20.597,29.29 21.968,29.341 48.664,29.366 49.73,29.366 50.873,29.366 58.722,30.001 59.941,30.001 21.892,30.484 20.546,30.509 55.471,32.186 61.999,32.186 52.372,35.97 55.064,36.199 53.109,36.224 55.725,36.224 53.794,36.25 54.429,36.25
GPIO0: Q1.1 U3.20 | length 36.3
  Top Layer w0.152: U3.20@49.526,31.189 49.526,31.924 49.984,32.382 v1(49.984,32.897) ; v1(60.043,16.031) 60.583,16.031 61.167,15.447 Q1.1@61.287,15.447
  Bottom Layer w0.152: v1(49.984,32.897) 49.984,33.57 50.074,33.659 51.508,33.659 51.813,33.354 51.813,32.008 50.391,30.585 47.254,30.585 47.165,30.496 47.165,28.807 47.521,28.452 50.975,28.452 54.836,24.591 54.836,20.451 55.928,19.359 55.928,17.022 56.919,16.031 v1(60.043,16.031)
GPIO8: J3.2 pad.1@65.199,15.422 U3.19 | length 41.1
  Top Layer w0.152: U3.19@49.926,31.189 49.926,31.772 50.476,32.321 50.476,32.594 50.594,32.712 50.594,32.973 v1(50.67,33.049) ; v1(64.069,15.472) 64.145,15.549 65.771,15.549 J3.2@65.963,15.74
  Bottom Layer w0.152: v1(50.67,33.049) 51.394,33.049 51.483,32.96 51.483,32.109 50.265,30.89 46.848,30.89 46.759,30.801 46.759,28.68 47.292,28.147 50.669,28.147 54.531,24.285 54.531,20.298 55.623,19.206 55.623,16.641 56.792,15.472 v1(64.069,15.472) 65.199,15.472 pad.1@65.199,15.422
GPIO9: T3.2 U3.25 U4.5 | length 36
  Top Layer w0.152: v1(45.246,30.47) 45.354,30.47 45.56,30.263 U3.25@47,30.263 ; T3.2@54.487,8.716 54.487,10.339 52.478,12.348 52.478,13.497 52.803,13.821 v1(53.566,13.821) 54.423,12.964 U4.5@56.054,12.964
  Bottom Layer w0.152: v1(45.246,30.47) 45.138,30.47 44.998,30.611 44.155,30.611 44.066,30.522 44.066,28.834 45.196,27.704 45.196,27.563 45.653,27.106 50.111,27.106 53.363,23.854 53.363,14.109 53.566,13.906 v1(53.566,13.821)
GPIO10: R25.2 U3.26 U4.4 | length 33
  Top Layer w0.152: v1(43.33,30.179) 43.437,30.179 43.608,30.35 44.654,30.35 45.14,29.863 U3.26@47,29.863 ; v1(52.982,13.288) 53.952,12.317 U4.4@56.054,12.317 56.964,12.317 57.376,12.729 R25.2@57.972,12.729
  Bottom Layer w0.152: v1(43.33,30.179) 43.33,28.909 45.438,26.801 49.959,26.801 52.982,23.778 v1(52.982,13.288)
GPIO11: R29.2 T3.3 U3.27 U4.6 | length 36.4
  Top Layer w0.152: v1(44.57,29.722) 44.606,29.722 44.864,29.463 U3.27@47,29.463 ; T3.3@53.21,8.716 53.21,10.888 52.173,11.925 52.173,13.623 52.875,14.325 54.175,14.325 54.889,13.612 U4.6@56.054,13.612 56.076,13.59 57.949,13.59 R29.2@57.972,13.567
  Bottom Layer w0.152: v1(44.57,29.722) 44.498,29.65 44.498,28.833 45.92,27.41 50.365,27.41 53.769,24.007 53.769,14.744 54.222,14.292 v1(54.222,14.279)
GPIO12: C39.1 R14.1 R16.2 U3.28 | length 37.1
  Top Layer w0.152: v1(20.698,18.292) 20.708,18.282 20.708,17.387 C39.1@20.718,17.377 ; v1(29.334,29.392) 29.39,29.392 29.718,29.063 U3.28@47,29.063
  Top Layer w0.381: C39.1@20.718,17.377 20.721,17.375 20.721,16.237 R16.2@20.724,16.234 R14.1@21.855,16.234
  Bottom Layer w0.152: v1(20.698,18.292) 23.695,21.289 23.695,26.14 26.947,29.392 v1(29.334,29.392)
GPIO19: U3.35 U5.7 | length 31.6
  Top Layer w0.152: U5.7@36.753,9.342 36.753,9.853 36.595,10.011 36.085,10.011 32.662,13.435 32.662,23.498 35.427,26.263 U3.35@47,26.263
GPIO20: R37.1 U3.36 | length 33.4
  Top Layer w0.152: R37.1@39.809,9.605 39.809,9.645 38.959,10.494 36.033,10.494 32.966,13.561 32.966,23.372 35.458,25.863 U3.36@47,25.863
GPIO21: R40.1 U3.37 | length 35
  Top Layer w0.152: R40.1@39.809,8.767 39.809,8.806 40.265,9.263 40.265,9.901 39.367,10.799 36.159,10.799 33.271,13.687 33.271,23.067 35.571,25.367 45.931,25.367 46.306,24.992 U3.37@47.926,24.992
GPIO22: J5.5 R22.2 U3.38 | length 60.6
  Top Layer w0.152: J5.5@2.819,14.881 3.096,14.604 6.373,14.604 v1(6.449,14.528) 6.449,12.271 6.748,11.972 7.175,11.972 9.2,13.997 R22.2@9.776,13.997 ; v1(38.177,24.863) 38.236,24.921 42.002,24.921 42.142,25.062 45.805,25.062 46.508,24.359 48.121,24.359 48.302,24.541 48.302,24.969 U3.38@48.326,24.992
  Bottom Layer w0.152: v1(6.449,14.528) 33.431,14.528 38.173,19.271 38.173,24.859 v1(38.177,24.863)
GPIO23: J5.4 R19.2 U3.39 | length 66
  Top Layer w0.152: J5.4@2.819,12.886 2.875,12.831 v1(5.357,12.831) 6.677,11.51 7.328,11.51 8.749,12.931 R19.2@9.761,12.931 ; U3.39@48.726,24.992 48.726,23.355 48.827,23.254 48.827,21.26 51.679,18.408 51.679,18.126 v1(51.741,18.063)
  Bottom Layer w0.152: v1(5.357,12.831) 5.941,13.415 20.538,13.415 20.64,13.517 26.205,13.517 26.294,13.605 33.801,13.605 33.89,13.694 36.389,13.694 36.783,14.088 49.793,14.088 51.741,16.036 v1(51.741,18.063)
GPIO24: J5.3 R15.2 U3.40 | length 67.3
  Top Layer w0.152: J5.3@2.819,10.891 2.836,10.875 v1(5.407,10.875) 7.262,10.875 8.252,11.866 R15.2@9.751,11.866 ; U3.40@49.126,24.992 49.126,23.386 49.132,23.38 49.132,21.405 52.245,18.292 v1(52.245,17.352)
  Bottom Layer w0.152: v1(5.407,10.875) 5.407,11.866 6.525,12.983 20.685,12.983 20.914,13.212 26.332,13.212 26.42,13.301 34.223,13.301 34.312,13.389 36.515,13.389 36.77,13.644 43.82,13.644 43.959,13.783 44.376,13.783 44.516,13.644 49.78,13.644 52.392,16.256 52.392,16.677 52.245,16.823 v1(52.245,17.352)
GPIO26: C13.2 R4.2 U3.42 | length 71.9
  Top Layer w0.152: U3.42@49.926,24.992 49.926,22.654 50.258,22.322 v1(50.258,22.214)
  Top Layer w0.203: v1(2.486,25.251) 3.731,26.496 C13.2@5.915,26.496
  Top Layer w0.254: C13.2@5.915,26.496 5.928,26.509 5.928,27.322 R4.2@5.941,27.334
  Bottom Layer w0.152: v1(2.486,25.251) 2.486,25.217 2.74,24.963 2.74,17.042 5.758,14.025 19.558,14.025 19.757,14.223 33.557,14.223 34.802,15.469 49.218,15.469 50.213,16.464 50.213,19.51 50.717,20.013 50.717,21.648 50.258,22.106 v1(50.258,22.214)
GPIO28: J3.5 pad.1@65.555,12.018 U3.44 | length 25.9
  Top Layer w0.152: U3.44@50.726,24.992 50.726,23.151 51.738,22.139 51.738,19.764 53.26,18.242 54.501,18.242 54.705,18.038 v1(54.789,18.038) ; v1(64.361,12.323) 65.01,12.323 65.096,12.237 65.732,12.237 J3.5@65.963,12.007
  Bottom Layer w0.152: v1(54.789,18.038) 54.861,17.966 54.861,15.803 58.112,12.551 64.073,12.551 64.301,12.323 v1(64.361,12.323) 65.555,12.323 pad.1@65.555,12.018
GPIO29: J3.4 pad.1@65.605,13.39 U3.45 | length 25.4
  Top Layer w0.152: U3.45@51.126,24.992 51.126,23.182 52.042,22.266 52.042,19.891 53.362,18.571 54.709,18.571 v1(54.887,18.749) ; v1(64.335,13.025) 64.411,13.101 65.813,13.101 J3.4@65.963,13.251
  Bottom Layer w0.152: v1(54.887,18.749) 55.293,18.343 55.293,16.184 58.452,13.025 v1(64.335,13.025) 65.605,13.025 pad.1@65.605,13.39
"IIC_INT GPIO25": U1.16 U3.41 | length 22.9
  Top Layer w0.152: U1.16@37.409,17.22 37.409,17.749 37.559,17.9 38.018,17.9 v1(38.063,17.945) ; U3.41@49.526,24.992 49.526,22.103 v1(50.213,21.416)
  Bottom Layer w0.152: v1(38.063,17.945) 39.977,16.031 49.349,16.031 49.908,16.59 49.908,21.111 v1(50.213,21.416)
IRQ: U2.23 U3.34 | length 25.1
  Top Layer w0.152: U2.23@22.634,27.172 22.634,26.527 22.723,26.437 34.584,26.437 34.81,26.663 U3.34@47,26.663
MISO: U2.31 U3.30 | length 24.2
  Top Layer w0.152: U2.31@23.884,30.935 24.869,30.935 27.541,28.263 U3.30@47,28.263
MOSI: U2.30 U3.31 | length 24.2
  Top Layer w0.152: U2.30@23.884,30.435 24.811,30.435 27.382,27.863 U3.31@47,27.863
NetA1_1: A1.1 C11.2 C21.2 C25.1 C26.1 C27.2 C29.1 C30.1 R7.2 | length 349
  Top Layer w0.356: v1(3.35,36.275) 3.68,35.945 3.68,35.007 4.606,34.081 C26.1@4.645,34.081 C25.1@5.56,34.081 5.599,34.041 5.599,32.248 6.144,31.703 6.144,31.119 8.549,28.713 8.549,28.593 8.716,28.426 A1.1@8.836,28.426 ; v1(6.906,33.684) 6.906,32.881 R7.2@6.957,32.83 6.969,32.818 9.789,32.818 C27.2@9.802,32.805
  Top Layer w0.381: C11.2@8.049,24.972 C21.2@8.049,26.013 8.049,26.928 8.836,27.715 A1.1@8.836,28.426
  Bottom Layer w0.356: v1(3.35,36.275) 3.35,17.563 5.724,15.189 33.249,15.189 36.827,18.767 36.827,39.493 34.674,41.646 6.303,41.646 4.1,39.443 4.1,17.722 6.02,15.803 33.144,15.803 36.319,18.978 36.319,39.283 34.464,41.138 6.513,41.138 4.746,39.371 4.746,18.003 6.311,16.438 32.941,16.438 35.75,19.246 35.75,38.799 34.019,40.53 6.915,40.53 5.397,39.011 5.397,35.193 v1(6.906,33.684)
NetA1_3: A1.3 C12.2 R4.1 | length 3.1
  Top Layer w0.254: A1.3@6.383,29.374 6.503,29.374 6.839,29.037 R4.1@6.839,27.334 6.835,27.329 6.835,26.501 C12.2@6.83,26.496
NetC3_2: C3.2 U2.22 Y1.4 | length 4
  Top Layer w0.152: U2.22@22.134,27.172 22.134,25.586 22.794,24.926 Y1.4@22.889,24.926 22.91,24.947 C3.2@24.28,24.947
NetC5_2: C5.2 R2.2 U3.48 | length 4.5
  Top Layer w0.152: U3.48@52.326,24.992 52.326,24.339 53.229,23.436 53.229,23.336 54.271,22.294 C5.2@54.271,22.254 54.307,22.218 54.307,21.376 R2.2@54.343,21.34
NetC6_2: C6.2 U2.21 Y1.2 | length 6.2
  Top Layer w0.152: C6.2@18.971,22.838 18.979,22.847 20.148,22.847 Y1.2@20.368,23.067 20.463,23.067 21.634,24.238 U2.21@21.634,27.172
NetC9_2: C9.2 C10.2 U3.1 | length 3.1
  Top Layer w0.203: U3.1@53.18,25.863 53.18,25.369 54.288,24.261 C9.2@54.328,24.261 C10.2@55.344,24.261
NetC11_1: C11.1 R3.2 | length 8.4
  Top Layer w0.229: C11.1@8.948,24.972 10.723,24.972 11.434,25.683 R3.2@17.082,25.683